# Altium PCB Solar_Charger.PcbDoc
Units mm, origin at the board's own origin, x right, y up, seen from the top; angles counter-clockwise.
Board outline 75.18 x 41.91 mm, 2 copper layers (Top Layer, Bottom Layer); 24 components, 16 nets, 57 pads, 8 vias.
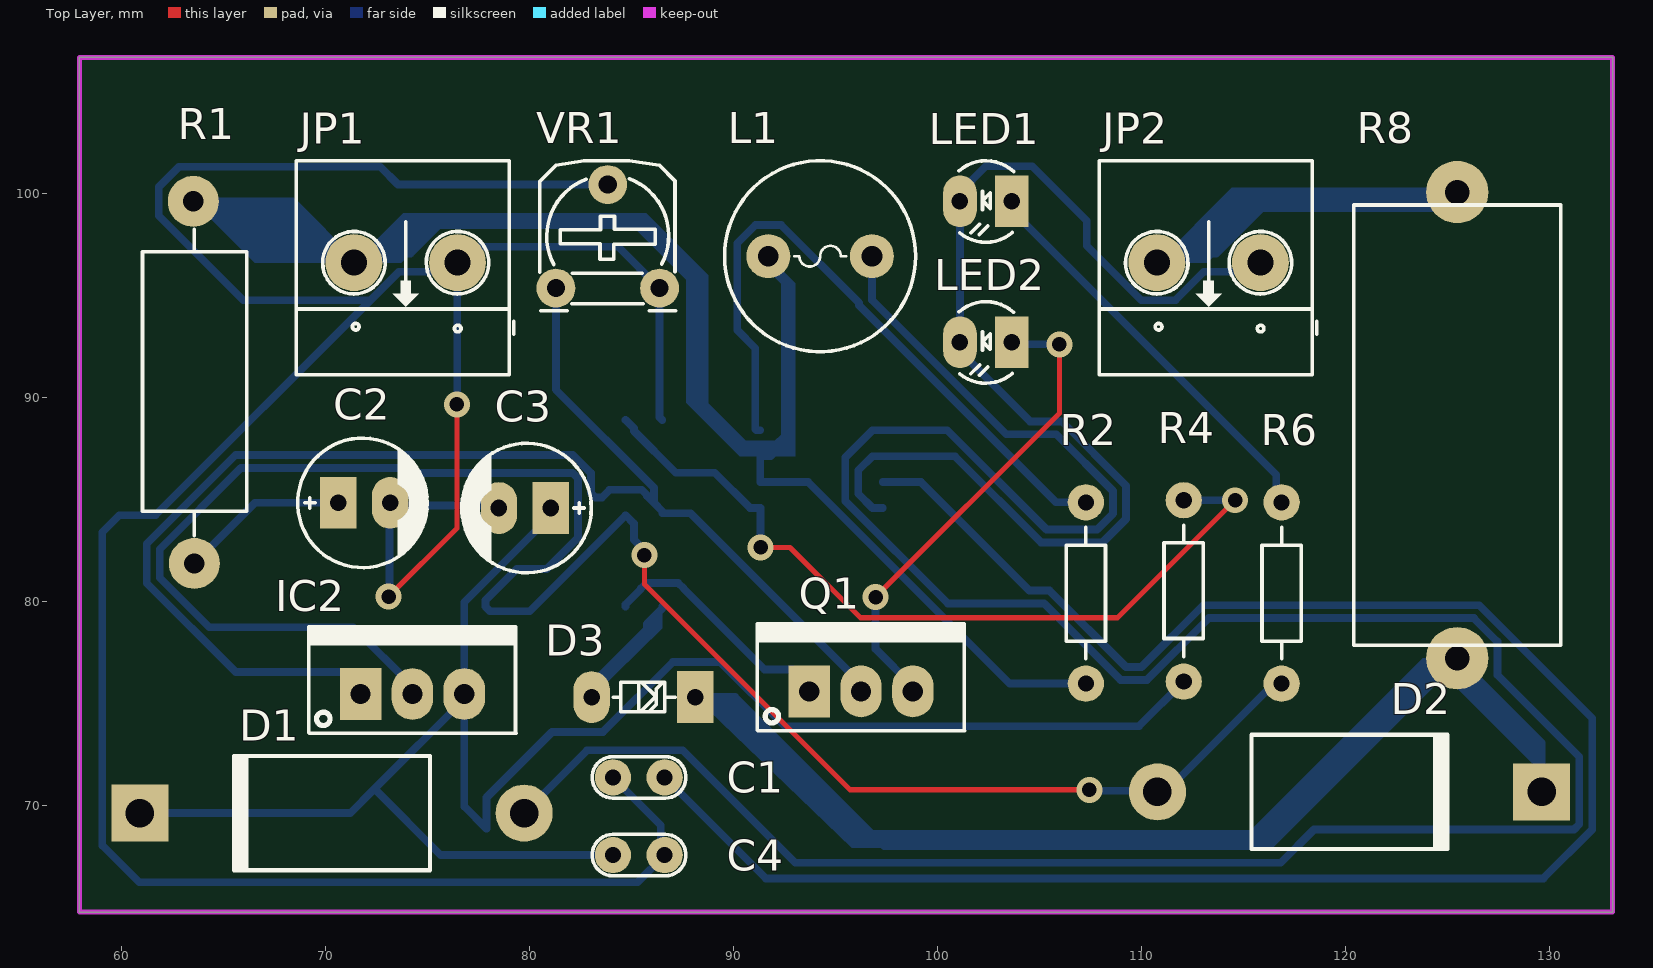
[diagram p0: Top Layer view]
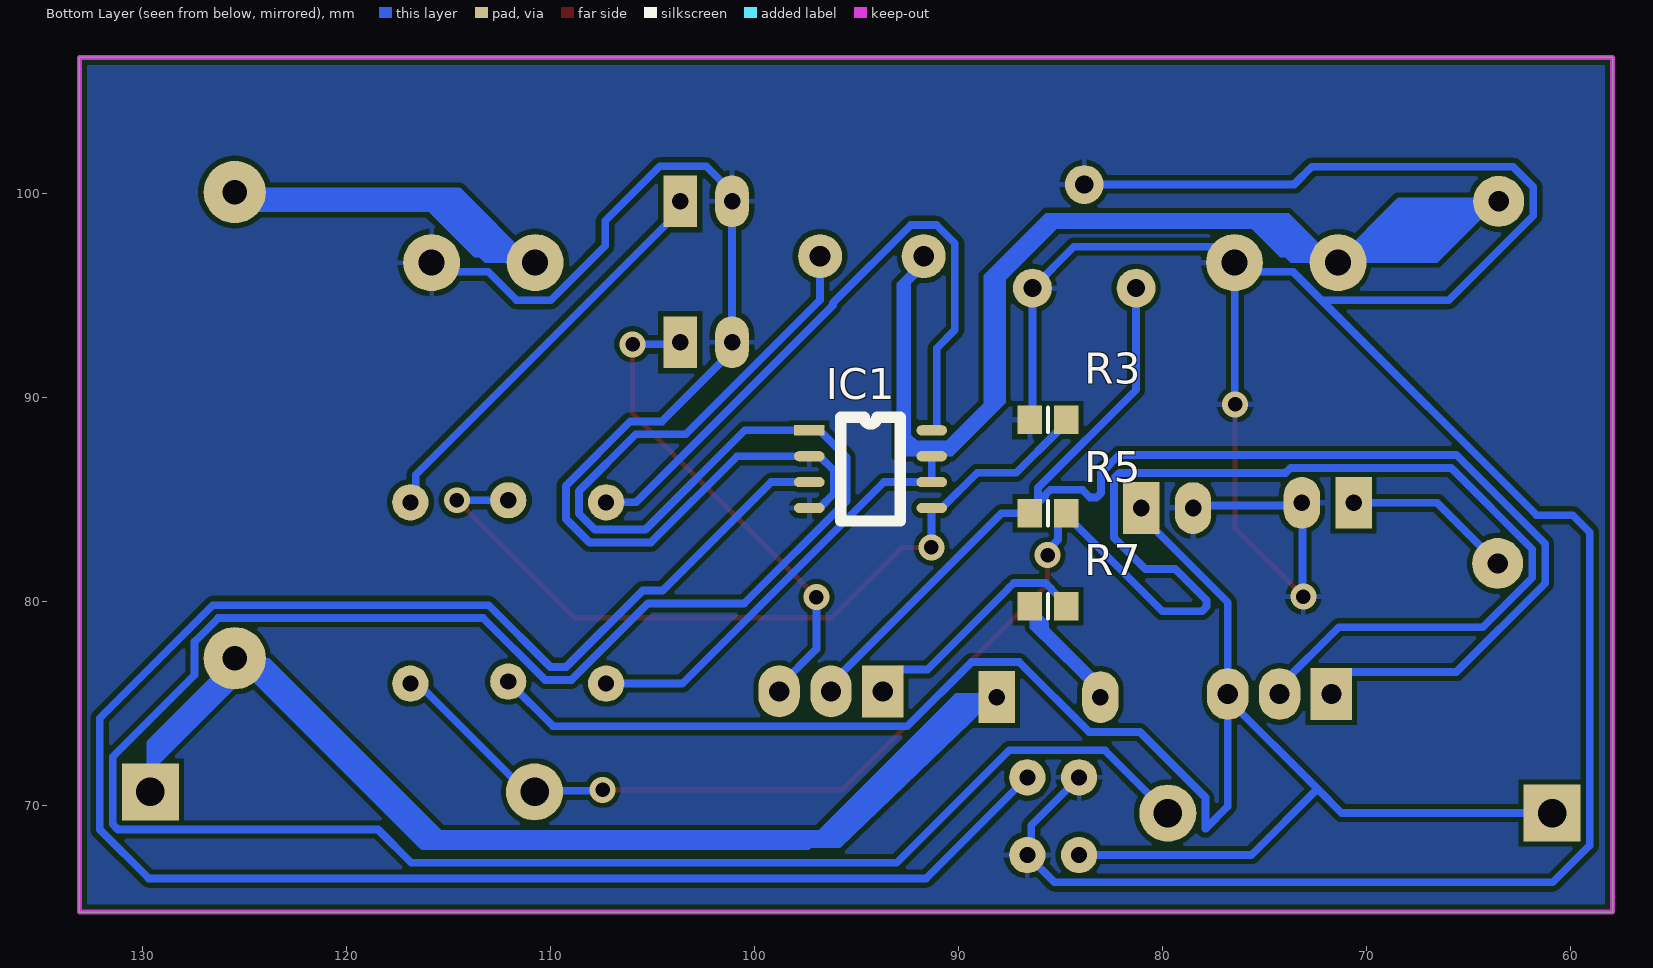
[diagram p1: Bottom Layer view, seen from below]
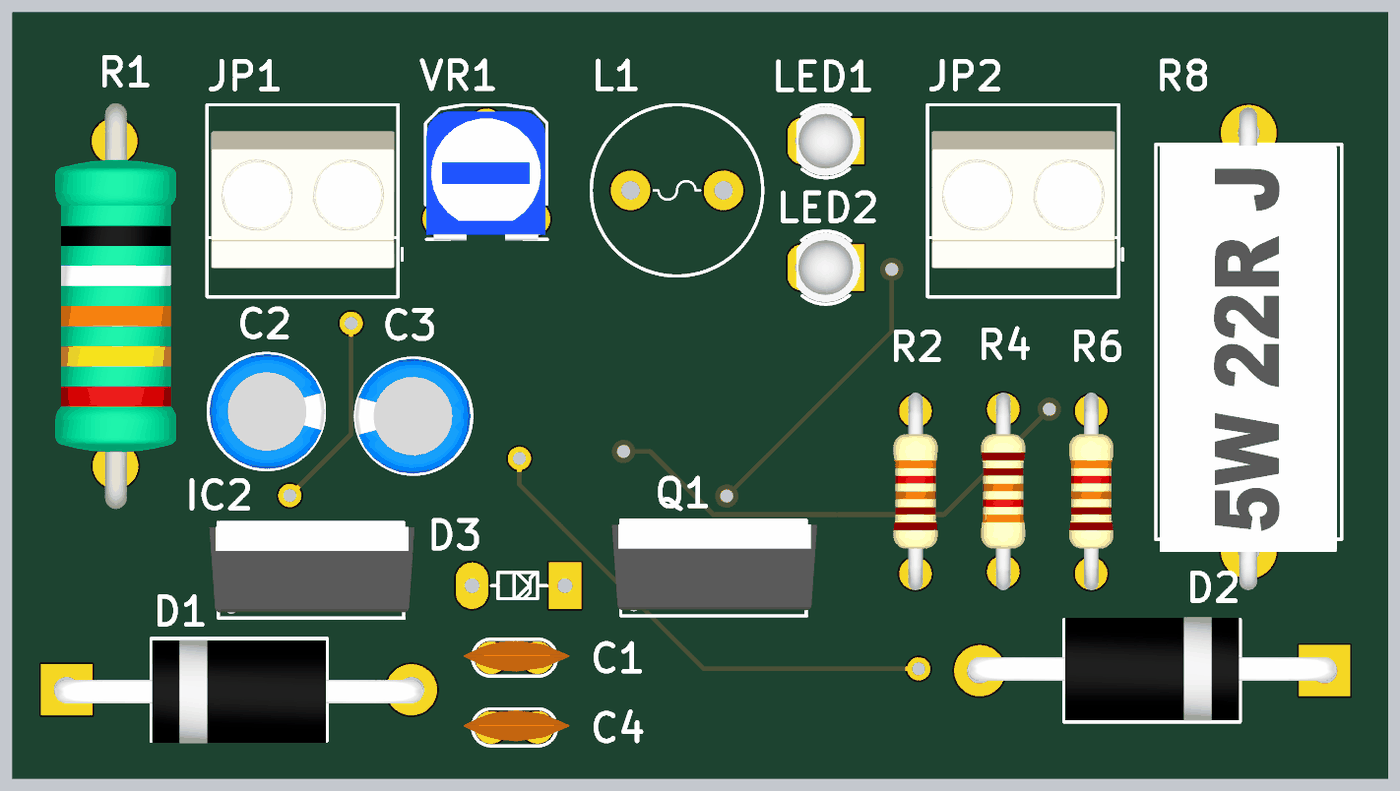
[diagram p2: 3D render of the assembled board from above, using the file's embedded part models]
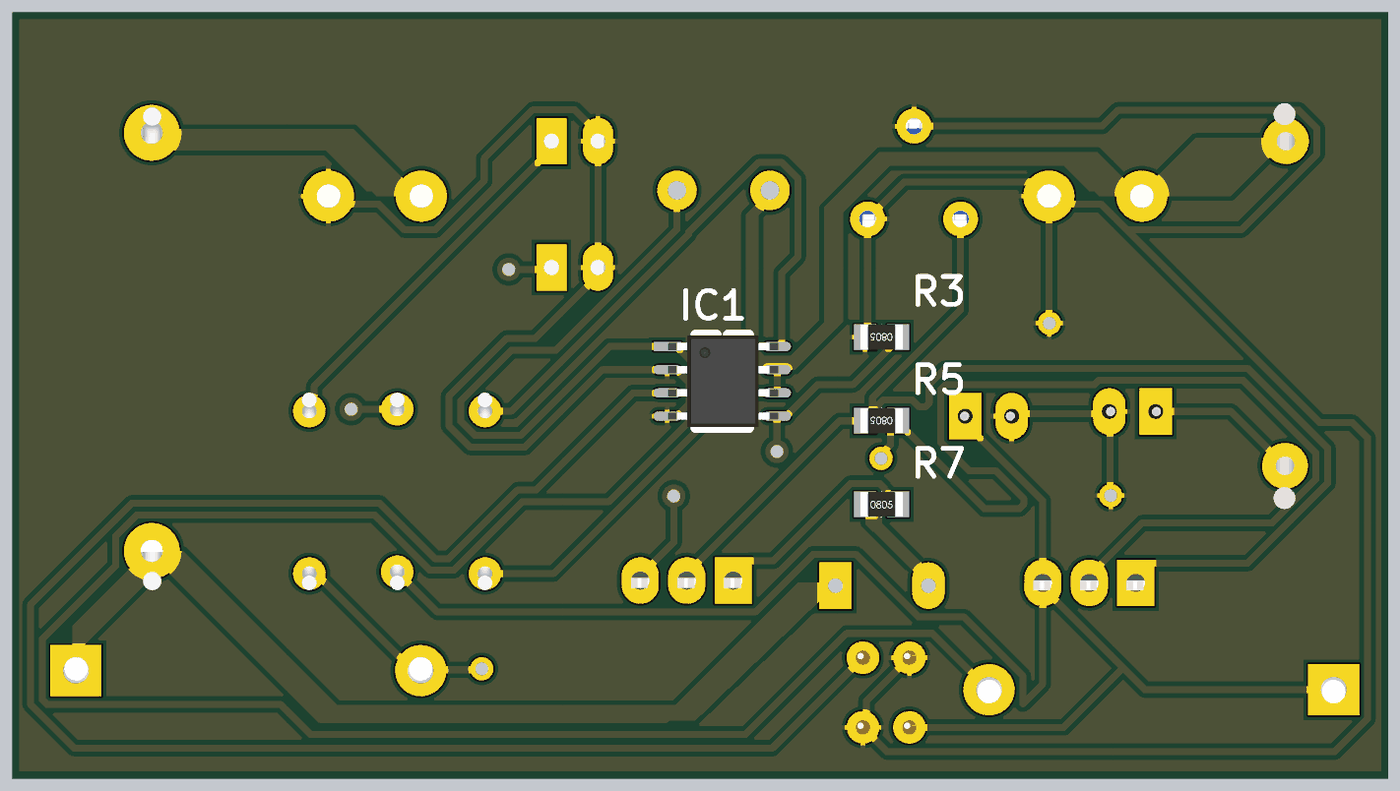
[diagram p3: 3D render of the assembled board from below, using the file's embedded part models]

## Layer stack, top to bottom
Top Solder: solder mask 0.0102, Solder Resist, Dk 3.5
Top Layer: signal copper 0.0356
Dielectric 1: dielectric 0.32, FR-4, Dk 4.8
Bottom Layer: signal copper 0.0356
Bottom Solder: solder mask 0.0102, Solder Resist, Dk 3.5

## Board outline
57.912,64.77 133.096,64.77 133.096,106.68 57.912,106.68

## Design rules (kind name [scope] priority, off if disabled: settings)
Clearance [All] p1: gap=0.254 ignorepadtopadclearanceinfootprint=FALSE except(0: Arc-Hole Track-Hole SMDPad-Hole THPad-Hole Via-Hole Fill-Hole Poly-Hole Region-Hole Text-Hole)
PolygonConnect [All] p1: connectstyle=Relief reliefconductorwidth=0.254 reliefentries=4 polygonreliefangle="90 Angle" airgapwidth=0.254
RoutingVias [All] p1: holewidth=0.711 width=1.27 viastyle="Through Hole" minholewidth=0.711 minwidth=1.27 maxholewidth=0.711 maxwidth=1.27
SilkToSolderMaskClearance [IsPad] p1 off: minsilkscreentomaskgap=0.254 clearancetoexposedcopper=TRUE
SolderMaskExpansion [All] p1: expansion=0.102 istentingtop=FALSE
Width [All] p1: maxlimit=0.381 minlimit=0.254 preferedwidth=0.381 toplayer_maxwidth=0.254 toplayer_prefwidth=0.254 bottomlayer_minwidth=0.381 minimp=50.000000 maximp=50.000000 favimp=50.000000
29 further rules are at their usual default settings.

## Components (designator, comment, footprint, x,y, rotation, side; value= is the part's Value field where it differs from the comment)
C1 "270pF" CN1 84.074,71.374 r0 top value=100pF
C2 "100uF" CP1/2.5 70.612,84.836 r0 top value="47uF/16 - 50V"
C3 "100uF" CP1/2.5 81.026,84.582 r180 top value="47uF/16 - 50V"
C4 "100 nF" CN1 84.074,67.564 r0 top value=100pF
D1 "1N5819" DO-201 79.724,69.621 r180 top
D2 "1N4007" DO-201 110.776,70.663 r0 top
D3 "6V/0.5W" DZ0.5A 83.033,75.311 r180 top value=3v3
IC1 "MC34063" SOP8 97.302,88.392 r180 bottom
IC2 "LM317" QTO-220 71.704,75.463 r0 top
JP1 "Header 2_1" HED2 76.454,96.613 r180 top value="Header 2"
JP2 "Header 2_1" HED2 115.824,96.613 r180 top value="Header 2"
L1 "330mH" L01 94.234,96.929 r0 top value="150 mH"
LED1 "LED" LED-3 103.632,99.621 r180 top value="LED 3 ly Single Colour"
LED2 "LED" LED-3 103.632,92.71 r180 top value="LED 3 ly Single Colour"
Q1 "BD139" QTO-220 93.701,75.59 r0 top
R1 "0.3 Ohm/2W" R2W 63.551,81.864 r90 top value="R2W - 47"
R2 "180 Ohm" R1/4W 107.264,84.861 r270 top value="R1/4W - 1K"
R3 "1k" 0805_Res 85.598,88.9 r0 bottom value="R1/4W - 1K"
R4 "4k" R1/4W 112.065,76.073 r90 top value="R1/4W - 1K"
R5 "1k" 0805_Res 85.598,84.328 r0 bottom value="R1/4W - 1K"
R6 "4k" R1/4W 116.865,84.861 r270 top value="R1/4W - 1K"
R7 "1k" 0805_Res 85.598,79.756 r180 bottom value="R1/4W - 1K"
R8 "R6W - 1k" R5W 125.476,77.216 r90 top value="R5W - 0,47R"
VR1 "1K" VR 81.28,95.364 r0 top value="VR 10K"

## Footprints (in the part's own frame and the unit in brackets; to place one, negate y for a bottom-side part, rotate by r counter-clockwise, add the part's x,y. Pads: shape width x height; smd on the part's side, far side on the other; paste and mask are expansions set on the pad)
0805_Res [mm] "Chip Resistor, Body 2.0x1.2mm, IPC Medium Density"
  rect 1.2x1.4 smd: 1(-0.9,0) 2(0.9,0)
  silkscreen extent 0,-0.6 0,0.6, body extent -1.15,-0.67 1.15,0.67, height 0.76
CN1 [mil]
  round 70 hole 31: 1(0,0) 2(100,0)
  silkscreen extent -40,-40 141,40, body extent -60,-30 170,37, height 265
CP1/2.5 [mil] "Tu hoa 33 >100 uF,50V, 220uF/16V,25V"
  rect 70x100 hole 32: 1(0,0)
  oval 70x100 hole 32: 2(100,0)
  silkscreen extent -78,-125 172,125, body extent -76,-124 172,124, height 422
DO-201 [mm] "Diode, Axial; Body 9.5 x 5.6 mm (LxDia. max), Lead Dia. 1.32 mm (max)"
  round 2.8 hole 1.4: 1(0,0)
  rect 2.8x2.8 hole 1.4: 2(18.84,0)
  silkscreen extent 4.62,-2.8 14.32,2.8, body extent -0.65,-2.72 19.49,2.92, height 5.82
DZ0.5A [mil] "Diode Zenner, W 80mil, L 300mil"
  oval 70x100 hole 32: 1(0,0)
  rect 70x100 hole 32: 2(-200,0)
  silkscreen extent -161,-29 -42,28
HED2 [mil] "Header 2, 2 pin, hight 300mil, Pin to Pin 200, Colour Green"
  round 110 hole 50: 1(0,0) 2(200,0)
  silkscreen extent -109,-197 311,217, body extent -92,-140 302,155, height 394
L01 [mil] "Inductor"
  round 85 hole 40: 1(-100,0) 2(100,0)
  silkscreen extent -184,-184 184,184
LED-3 [mil] "LED 2 PIN, 3ly Only colour"
  rect 65x100 hole 32: 1(0,0)
  oval 65x100 hole 32: 2(100,0)
  silkscreen extent -4,-78 102,79, body extent -25,-75 113,75, height 217
QTO-220 [mil] "TO-220 - 1-2-3"
  rect 80x100 hole 39: 1(0,0)
  oval 80x100 hole 39: 2(100,0) 3(200,0)
  silkscreen extent -100,-76 300,130, body extent -119,-64 322,121, height 755
R1/4W [mil] "R 1/4W, 2 Pin, 350mil"
  round 70 hole 31: 1(0,0) 2(350,0)
  silkscreen extent 48,-38 302,38, body extent -40,-47 386,47, height 111
R2W [mm] "R2W, 2 pin, 700mil"
  round 2.5 hole 1: 1(0,0) 2(17.755,0.051)
  silkscreen extent 1.37,-2.57 16.38,2.54, body extent -2.36,-3.33 19.84,3.27, height 8.3
R5W [mil] "R5W , 2 pin, 400 x 950mil"
  round 120 hole 47.24: 1(0,0) 2(900,0)
  silkscreen extent 25,-200 875,200, body extent -85,-190 955,192, height 363
SOP8 [mm]
  rect 1.5x0.5 smd: 1(0,0)
  oval 1.5x0.5 smd: 2(0,-1.27) 3(0,-2.54) 4(0,-3.81) 5(6,-3.81) 6(6,-2.54) 7(6,-1.27) 8(6,0)
  silkscreen extent 1.54,-4.45 4.46,0.63, body extent 0.03,-4.41 6.07,0.61, height 1.6
VR [mil] "Resistor Variable"
  round 75 hole 35: 1(0,0) 2(100,200) 3(200,0)
  silkscreen extent -31,-44 231,246, body extent -29,-46 227,232, height 295

## Part data
C1 C4: library part CN1, "Cap np  1pF - 472pF"
C2 C3: library part CP2, "C 47uF/50V , 220uF/16V", Description 1="470uF/6,3V - 330uF/10V - 220uF/16V", Description 2="100uF/25V - 35V - 47uF/50V - 22uF/100V", Description 3="33uF => 47uF/63V - 1uF => 4,7uF/160V", Description 4="1uF => 2,2uF/250V - 1uF/350V"
D3: library part DZ, "Diode Zenner"
IC1: library part SO8
IC2: "Adj Voltage +1.2 -> +37V"
JP1 JP2: "Header, 2-Pin", Manufacturer="Generic Components", Class=Connector
L1: library part L1, "Inductor"
LED1 LED2: "LED Single colour Green and Red"
R1: library part R2W, "Resistor 2W"
R2 R4 R6: library part R1/4W, "Resistor 1/4W"
R3 R5 R7: library part R, "Resistor 1/4W"
R8: library part R5W, "Resistor 5W"
VR1: library part VR1, "Var Resistor"

## Via types
v1: diameter 1.27, hole 0.711, Top Layer to Bottom Layer, 8 vias

## Nets (pads, with @x,y where several pads share a name; then routed paths per layer and width w, separated by ;. In a path a pad name is that pad's centre, name@x,y a point inside that pad or via, vN(x,y) a via of type N, cw(c..) or ccw(c..) an arc to the next point about the centre after c; other vN are vias at no path point)
GND: C1.1 C2.2 C3.2 C4.2 IC1.2 IC1.4 JP1.1 JP2.1 LED1.2 LED2.2 R3.2 VR1.2 VR1.3 | length 212.6
  Top Layer w0.254: v1(73.076,80.239) 76.429,83.591 v1(76.429,89.662) ; C4.2@86.106,67.818 86.36,67.818 C4.2 ; LED2.2@100.838,92.964 LED2.2
  Bottom Layer w0.381: v1(73.076,80.239) 73.114,80.277 73.114,84.798 C2.2 73.279,84.709 78.359,84.709 C3.2 ; JP1.1@76.246,97.396 84.328,97.396 VR1.3 86.36,89.038 R3.2 ; v1(76.429,89.662) 76.441,89.675 JP1.1@76.441,96.6 ; JP1.1 JP1.1@76.441,96.6 ; VR1.2 73.537,100.444 72.668,101.313 62.798,101.313 61.805,100.32 61.805,98.917 65.951,94.771 72.186,94.771 ; C1.1 86.423,69.025 86.423,67.754 C4.2 85.281,66.23 60.846,66.23 59.039,68.037 59.039,83.398 59.868,84.226 61.641,84.226 72.186,94.771 ; IC1.4 96.802,84.582 96.107,85.276 96.107,86.428 96.802,87.122 IC1.2 100.842,87.122 105.071,82.893 108.08,82.893 109.233,84.046 109.233,85.677 106.081,88.829 104.529,88.829 101.092,92.266 LED2.2 LED1.2 101.092,100.066 102.362,101.336 104.642,101.336 107.311,98.666 107.311,97.441 109.981,94.771 111.655,94.771 113.052,96.168 115.379,96.168 JP2.1 ; 72.186,94.771 73.583,96.168 76.01,96.168 JP1.1@76.441,96.6
NetC1_2: C1.2 IC1.3 | length 96.1
  Bottom Layer w0.381: C1.2 91.567,66.421 129.701,66.421 132.096,68.816 132.096,74.278 126.554,79.819 113.027,79.819 109.995,76.787 109.233,76.787 105.479,80.541 104.491,80.541 99.18,85.852 IC1.3
NetC2_1: C2.1 R1.1 | length 8.3
  Bottom Layer w0.381: R1.1 66.523,84.836 C2.1
NetC3_1: C3.1 C4.1 D1.2 IC2.3 R4.1 | length 89.9
  Bottom Layer w0.381: D1.2 71.196,69.621 72.385,70.811 ; C3.1 81.026,84.201 76.784,79.959 IC2.3 IC2.3@76.784,75.209 ; C4.1 75.632,67.564 72.385,70.811 ; R4.1 109.868,73.876 92.5,73.876 89.351,77.025 87.014,77.025 83.585,73.596 81.09,73.596 77.879,70.385 77.879,68.857 76.784,69.952 IC2.3@76.784,75.209 ; 72.385,70.811 IC2.3@76.784,75.209
NetD1_1: D1.1 IC1.1 L1.2 | length 141.1
  Bottom Layer w0.381: D1.1 82.81,72.707 87.49,72.707 93.015,67.183 116.817,67.183 118.453,68.818 131.2,68.818 131.461,69.079 131.461,72.384 127.444,76.401 127.444,78.031 126.291,79.184 113.29,79.184 110.258,76.152 108.97,76.152 105.216,79.906 100.496,79.906 95.472,84.929 95.472,87.063 96.802,88.392 IC1.1 ; L1.2 96.774,94.787 103.368,88.194 105.818,88.194 108.598,85.414 108.598,84.309 107.817,83.528 105.334,83.528 100.47,88.392 IC1.1@97.361,88.392
NetD2_1: D2.1 IC2.2 R5.1 R6.2 | length 98.1
  Top Layer w0.254: v1(85.623,82.271) 85.623,80.843 95.702,70.764 v1(107.442,70.764)
  Bottom Layer w0.381: IC2.2 74.244,75.838 71.343,78.74 64.279,78.74 61.856,81.162 61.856,82.566 65.841,86.55 73.704,86.55 73.958,86.296 82.099,86.296 82.359,86.036 82.359,83.128 80.827,81.595 79.36,81.595 77.828,80.063 77.828,79.747 78.051,79.524 79.994,79.524 84.698,84.228 85.107,83.818 85.107,83.027 85.623,82.511 v1(85.623,82.271) ; v1(107.442,70.764) 107.493,70.714 110.725,70.714 D2.1 111.179,70.663 116.487,75.971 R6.2
NetD2_2: D2.2 D3.2 R8.1 | length 52.5
  Bottom Layer w0.381: D3.2 90.068,75.311 97.384,67.996 116.256,67.996 R8.1 129.616,73.076 D2.2
NetD3_1: D3.1 R7.1 | length 5.9
  Bottom Layer w0.381: D3.1 83.033,75.692 85.742,78.402 85.742,78.901 86.498,79.656 R7.1
NetIC1_5: IC1.5 R3.1 R4.2 | length 40
  Top Layer w0.254: v1(91.313,82.652) 92.753,82.652 96.207,79.197 108.814,79.197 v1(114.579,84.963)
  Bottom Layer w0.381: R3.1 85.107,88.49 85.107,88.362 87.159,86.31 89.073,86.31 90.802,84.582 IC1.5 91.307,84.576 91.307,82.657 v1(91.313,82.652) ; R4.2 v1(114.579,84.963)
NetIC1_6: IC1.6 IC1.7 JP1.2 L1.1 R1.2 R2.2 | length 71.1
  Bottom Layer w0.381: R1.2 68.368,99.619 JP1.2 71.819,97.057 74.146,97.057 75.543,98.454 85.246,98.454 87.88,95.82 87.88,90.332 90.514,87.698 92.089,87.698 92.496,88.104 ; L1.1 91.694,96.448 92.496,95.646 92.496,88.104 ; R2.2 103.532,75.971 93.652,85.852 IC1.6 IC1.7 91.802,87.122 92.496,87.816 92.496,88.104
NetIC1_8: IC1.8 R2.1 | length 32.9
  Bottom Layer w0.381: IC1.8 91.114,88.392 91.059,88.447 91.059,92.419 90.17,93.308 90.17,97.56 91.063,98.453 92.325,98.453 96.139,94.639 96.139,94.524 105.802,84.861 R2.1
NetIC2_1: IC2.1 Q1.2 R5.2 VR1.1 | length 70.1
  Bottom Layer w0.381: IC2.1 71.704,75.717 70.879,76.543 65.577,76.543 61.221,80.899 61.221,82.829 65.578,87.185 82.108,87.185 82.995,86.299 82.995,85.315 83.218,85.092 83.533,85.092 83.914,85.472 85.482,85.472 85.752,85.203 85.752,85.174 R5.2@86.088,84.837 ; VR1.1 81.28,90.389 86.088,85.581 R5.2@86.088,84.837 ; Q1.2 96.241,75.965 87.878,84.328 R5.2 86.498,84.428 R5.2@86.088,84.837
NetJP2_2: JP2.2 R8.2 | length 16.2
  Bottom Layer w0.381: JP2.2 111.188,97.057 113.664,97.057 116.683,100.076 R8.2
NetLED1_1: LED1.1 R6.1 | length 20.2
  Bottom Layer w0.381: LED1.1 103.632,99.177 116.598,86.211 116.598,85.129 R6.1
NetLED2_1: LED2.1 Q1.3 | length 23.9
  Top Layer w0.254: v1(96.952,80.213) 105.969,89.23 v1(105.969,92.608)
  Bottom Layer w0.381: v1(96.952,80.213) 96.952,77.673 98.781,75.844 Q1.3 ; LED2.1 103.734,92.608 v1(105.969,92.608)
NetQ1_1: Q1.1 R7.2 | length 11.9
  Bottom Layer w0.381: R7.2 84.698,79.856 85.444,80.602 85.444,80.631 85.714,80.901 87.282,80.901 87.542,80.64 87.542,80.63 91.503,76.67 92.875,76.67 93.701,75.844 Q1.1

## Polygon pours and split planes (outlines as drawn)
GND on Bottom Layer "GND_L02_P000" (solid, pour order 0): 58.039,106.553 132.969,106.553 132.969,64.897 58.039,64.897

## Keep-outs
Keep-Out Layer:
  lines w0.254: 57.912,64.77 57.912,106.172 57.912,106.68 58.42,106.68 133.096,106.68 133.096,64.77 57.912,64.77

## Other copper
Bottom Layer:
  region net NetD3_1: 83.033,75.311 83.033,76.191 86.487,79.645 86.487,78.689
  region net NetD2_2: 88.113,75.311 90.068,75.311 97.46,67.92 95.783,67.92
  region net NetD2_2: 116.357,67.996 116.23,67.996 115.392,68.834 115.341,68.783 96.698,68.783 96.698,68.682 97.46,67.92 116.18,67.92
  region net NetD2_2: 115.4,68.826 114.493,67.92 116.18,67.92 117.424,69.164 117.424,69.317
  region net NetD2_2: 116.256,67.996 116.357,67.996 117.45,69.088
  region net NetD2_2: 125.476,77.216 123.774,77.216 115.392,68.834 115.408,68.818 117.078,68.818
  region net NetD2_2: 125.476,77.216 129.616,73.076 129.616,71.603 125.476,75.743
  region net NetJP2_2: 116.683,100.076 113.22,96.613 110.76,96.613 114.427,100.279 125.273,100.279 125.476,100.076 124.968,99.568 116.281,99.568 116.192,99.657
  region net NetJP2_2: 125.476,100.076 124.511,99.111 115.824,99.111 115.824,99.187 115.773,99.238 116.611,100.076
  region net NetJP2_2: 110.744,96.613 113.22,96.613 116.683,100.076
  region net NetIC1_6: 91.694,96.929 93.015,95.608 93.015,87.122 91.302,87.122 92.284,88.104 92.496,88.104 92.496,95.646 91.694,96.448
  region net NetIC1_6: 90.297,87.706 90.306,87.698 92.089,87.698 92.089,87.314 91.897,87.122 90.693,87.122
  region net NetIC1_6: 87.88,90.332 91.09,87.122 90.297,87.122 87.681,89.738 87.681,95.961 87.909,96.19
  region net NetIC1_6: 71.374,96.613 73.796,99.035 85.7,99.035 88.748,95.987 88.748,89.535 88.677,89.535 87.88,90.332 87.88,95.82 85.246,98.454 75.543,98.454
  region net NetIC1_6: 71.374,96.613 73.215,98.454 75.543,98.454 73.701,96.613
  region net NetIC1_6: 63.5,99.619 66.506,96.613 71.374,96.613 68.368,99.619